# Altium PCB GATE_V3.PcbDoc
Units mm, origin at the board's own origin, x right, y up, seen from the top; angles counter-clockwise.
Board outline 71.37 x 50.42 mm, 2 copper layers (Top Layer, Bottom Layer); 47 components, 44 nets, 244 pads, 54 vias.
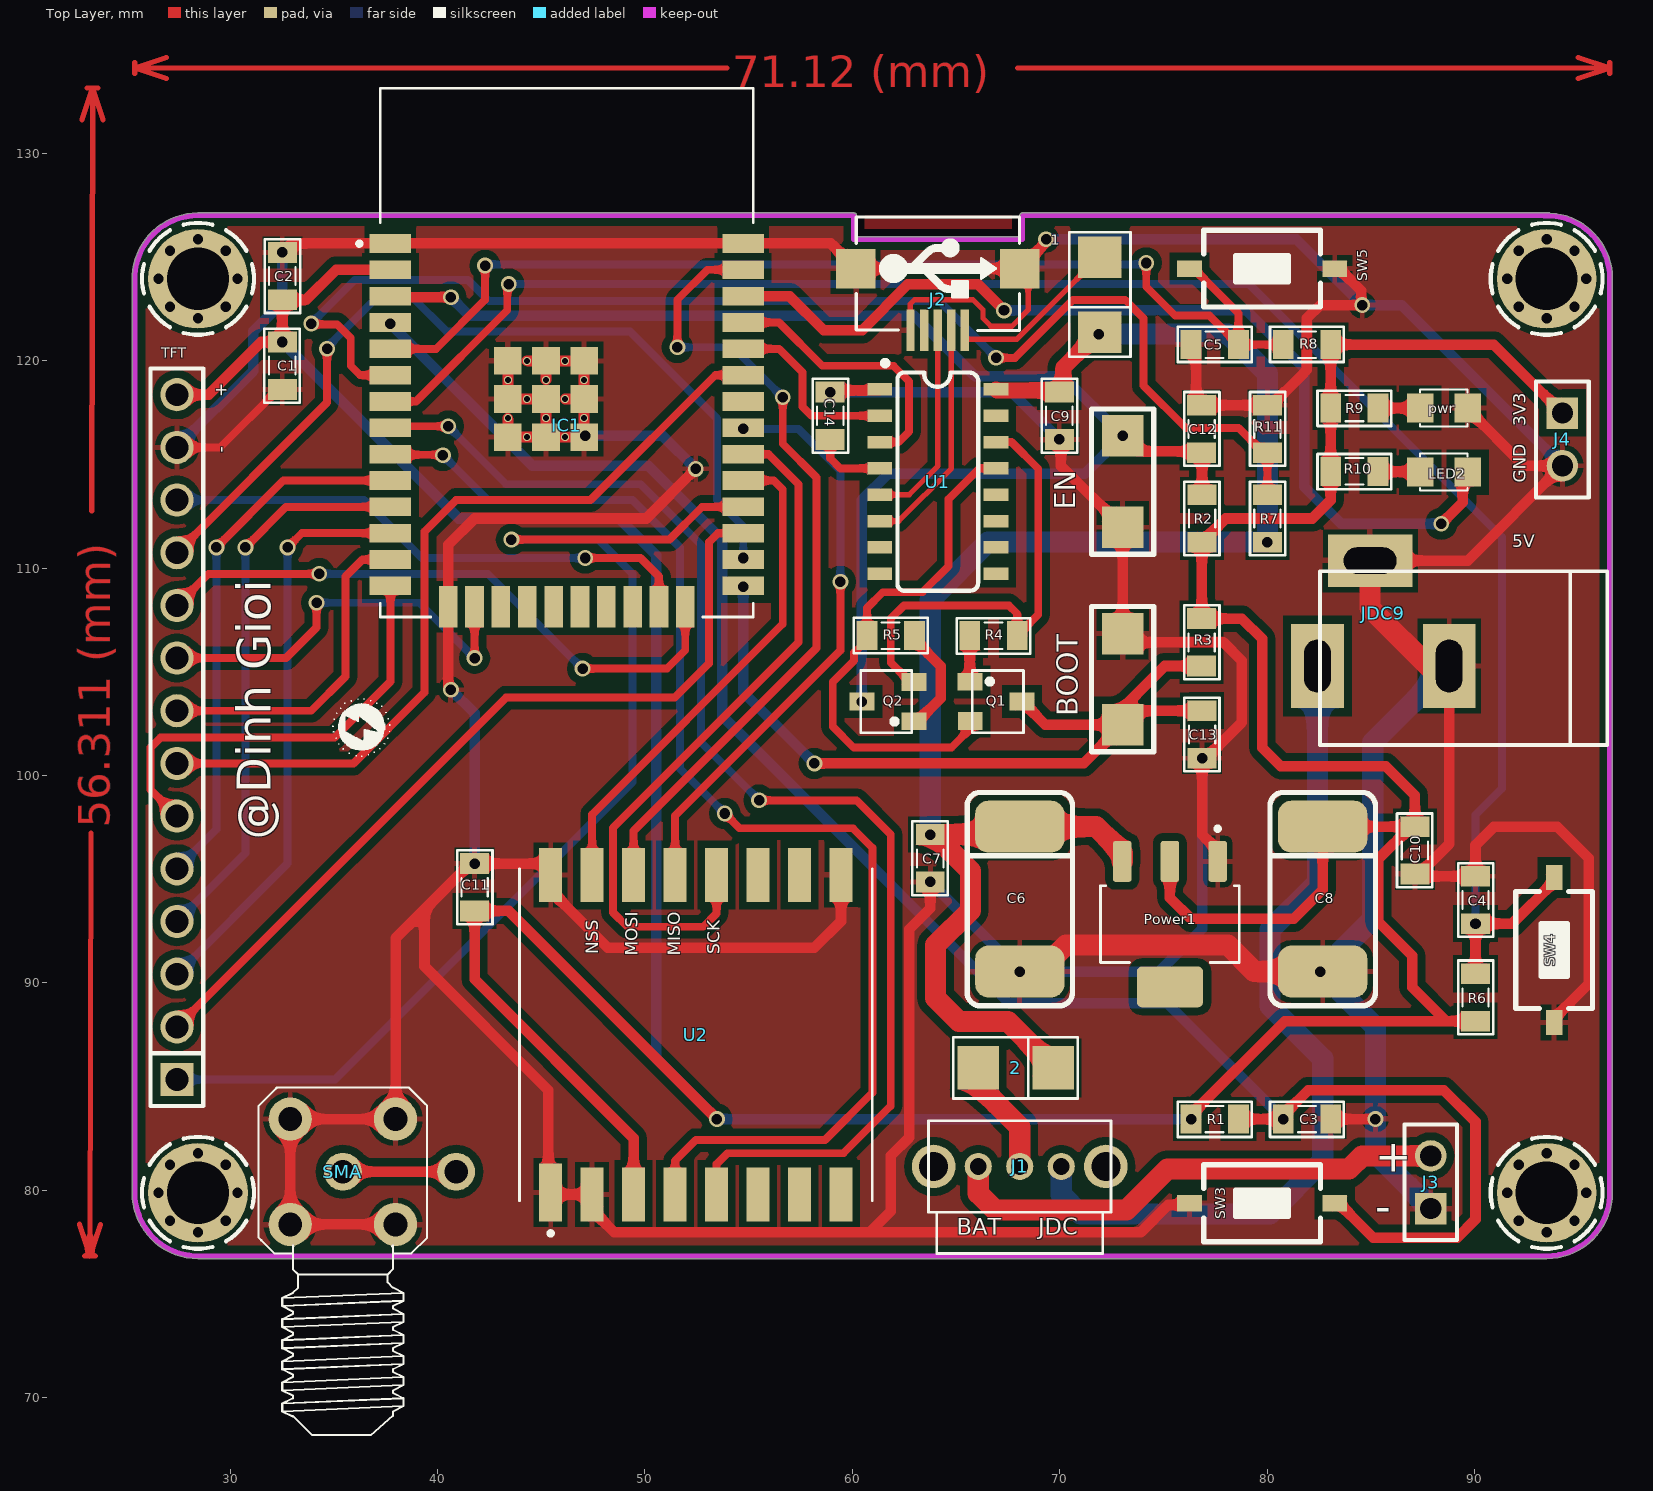
[diagram p0: Top Layer view]
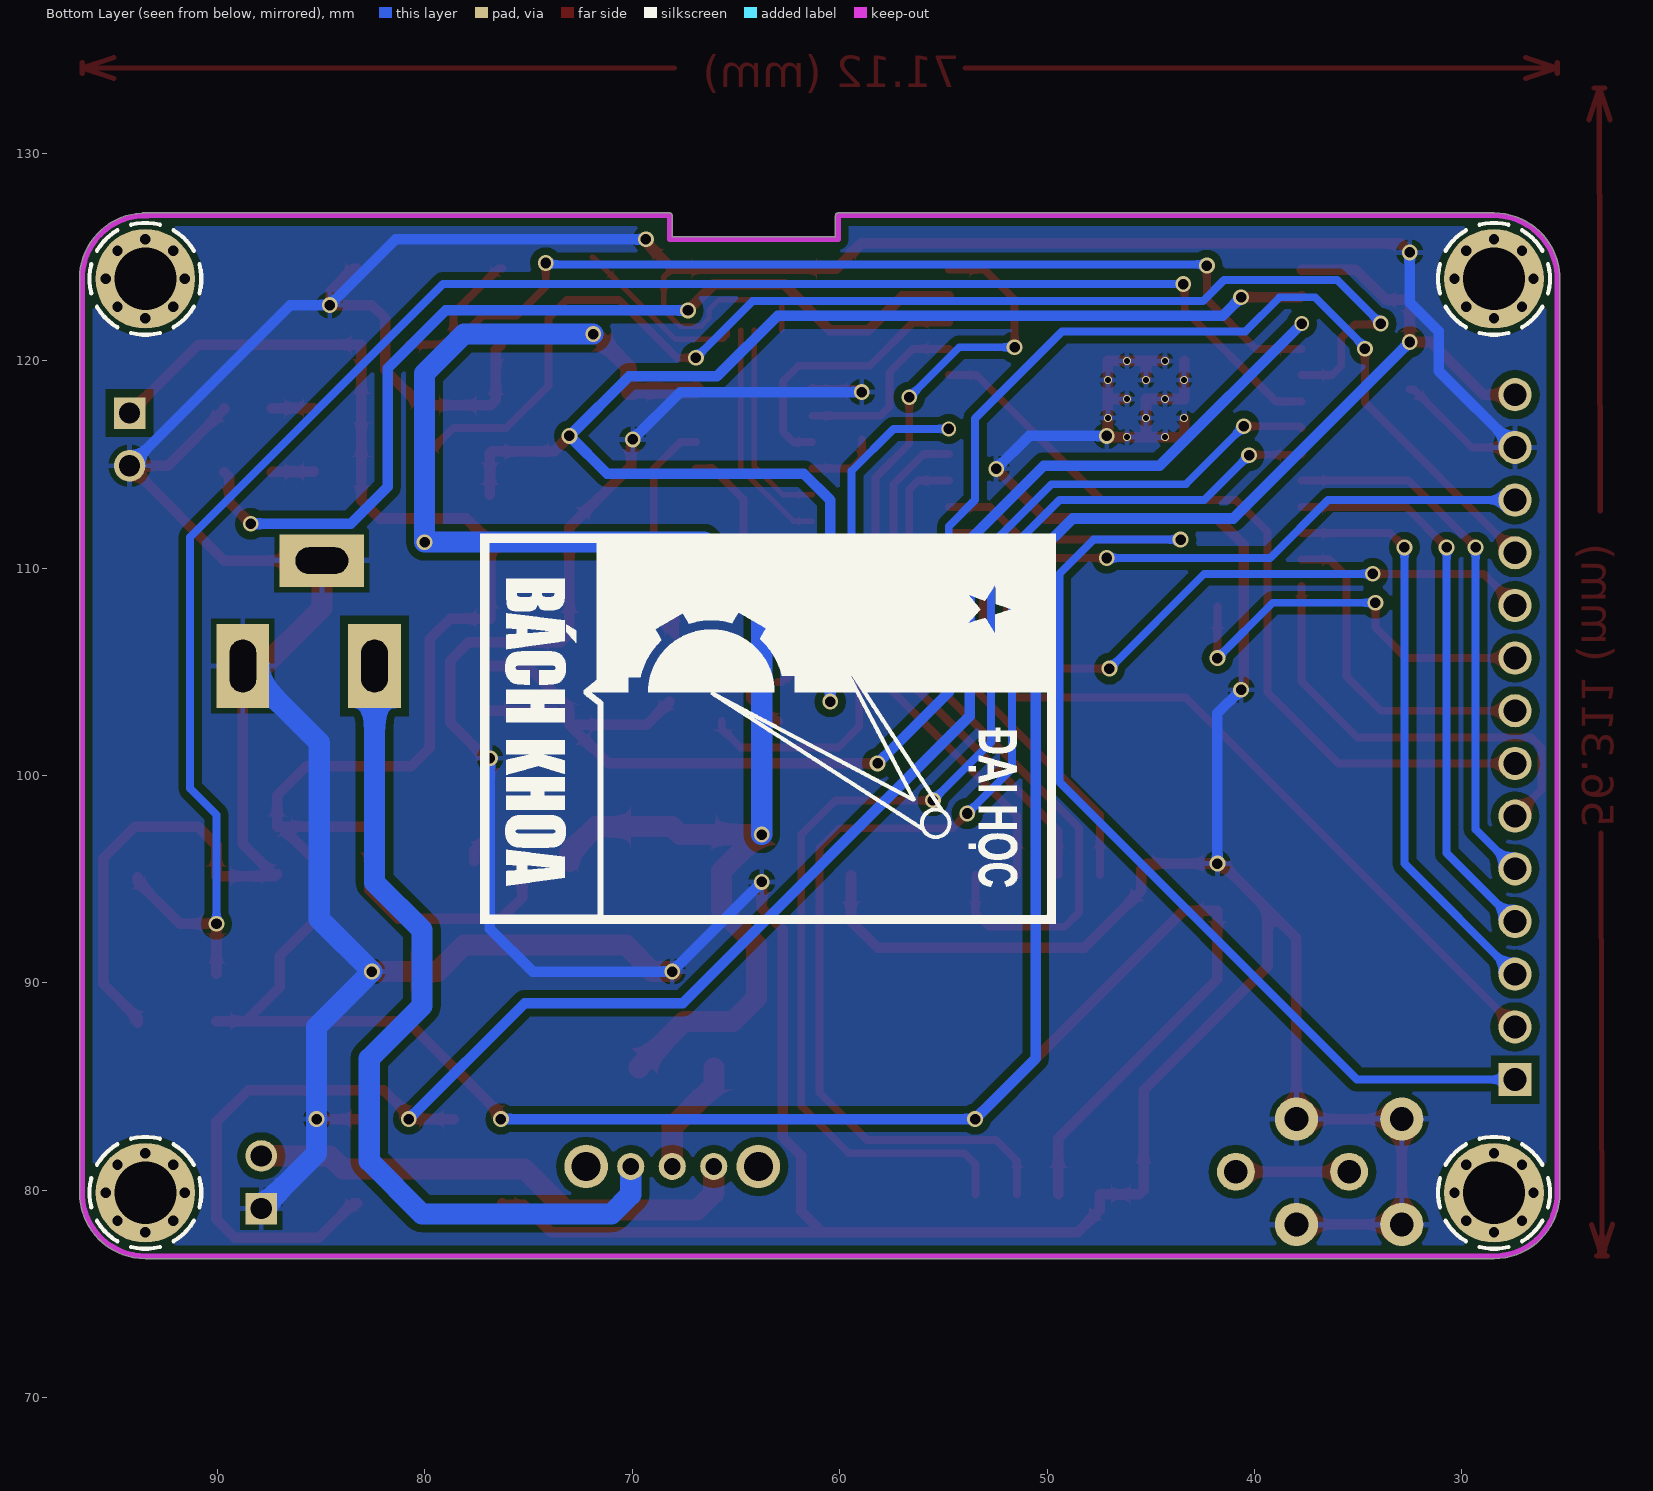
[diagram p1: Bottom Layer view, seen from below]

## Layer stack, top to bottom
Top Solder: solder mask 0.0102, Solder Resist, Dk 3.5
Top Layer: signal copper 0.0356
Dielectric 1: dielectric 0.32, FR-4, Dk 4.8
Bottom Layer: signal copper 0.0356
Bottom Solder: solder mask 0.0102, Solder Resist, Dk 3.5

## Board outline
28.447,76.708 cw(c28.448,79.883) 25.273,79.883 25.273,123.825 cw(c25.4,123.825) 25.274,123.846 cw(c28.448,123.952) 28.448,127.127 cw(c28.448,127) 28.449,127.127 60.071,127.127 cw(c60.071,127) 60.198,127 60.198,125.984 68.072,125.984 68.072,127 cw(c68.199,127) 68.199,127.127 93.599,127.127 cw(c93.599,127) 93.631,127.123 cw(c93.472,123.952) 96.647,123.952 cw(c96.52,123.952) 96.647,123.951 96.647,80.01 cw(c96.52,80.01) 96.646,79.989 cw(c93.472,79.883) 96.647,79.883 cw(c93.472,79.883) 93.472,76.708 28.448,76.708 cw(c28.448,76.835)

## Design rules (kind name [scope] priority, off if disabled: settings)
Clearance [All] p1: gap=0.254 ignorepadtopadclearanceinfootprint=TRUE except(0.381: Arc-Fill Arc-Poly Arc-Region Track-Fill Track-Poly Track-Region SMDPad-Fill SMDPad-Poly SMDPad-Region THPad-Fill THPad-Poly THPad-Region Via-Fill Via-Poly Via-Region Fill-Fill Fill-Poly Fill-Region Poly-Poly Poly-Region Region-Region)
PolygonConnect [All] p1: connectstyle=Relief reliefconductorwidth=0.254 reliefentries=4 polygonreliefangle="90 Angle" airgapwidth=0.254
RoutingVias [All] p1: holewidth=0.508 width=0.762 viastyle="Through Hole" minholewidth=0.508 minwidth=0.762 maxholewidth=0.711 maxwidth=1.27
SolderMaskExpansion [All] p1: expansion=0.102
Width [All] p1: maxlimit=1.016 minlimit=0.254 preferedwidth=0.508
30 further rules are at their usual default settings.

## Components (designator, comment, footprint, x,y, rotation, side; value= is the part's Value field where it differs from the comment)
1 "S4" DIO-214AC(SMA) 71.882,123.116 r90 top
2 "S4" DIO-214AC(SMA) 67.945,85.852 r180 top
BOOT "SW" "SW 3x2x4" 73.025,104.648 r90 top value="SW chip 2 pin" (schematic designator SW2)
C1 "10uF" CAP_0805 32.512,119.761 r270 top value=33p
C2 "100nF" CAP_0805 32.512,124.079 r90 top value=33p
C3 "100nF" CAP_0805 81.915,83.439 r0 top value=33p
C4 "100nF" CAP_0805 90.043,94.001 r90 top value=33p
C5 "100nF" CAP_0805 77.47,120.777 r180 top value=33p
C6 "22uF/10V" CAP_7343 68.072,94.107 r270 top
C7 "100nF" CAP_0805 63.754,96.012 r270 top value=33p
C8 "22uF/10V" CAP_7343 82.677,94.107 r270 top
C9 "10uF" CAP_0805 69.977,117.348 r90 top value=33p
C10 "100nF" CAP_0805 87.122,96.393 r270 top value=33p
C11 "10uF" CAP_0805 41.783,94.615 r90 top value=33p
C12 "100nF" CAP_0805 76.835,116.713 r90 top value=33p
C13 "100nF" CAP_0805 76.86,101.981 r270 top value=33p
C14 "100nF" CAP_0805 58.928,117.348 r90 top value=33p
EN "SW" "SW 3x2x4" 73.025,114.173 r270 top value="SW chip 2 pin" (schematic designator SW1)
IC1 "ESP32-WROOM-32" MODULE_ESP32-WROOM-32 46.228,120.396 r0 top
J1 "SK12D07VG4" SK12D07VG4 68.07,81.153 r0 top
J2 "USB-5" USB-M1 64.12,121.476 r0 top
J3 "JP2" JP2-C1T 87.884,79.121 r90 top
J4 "JP2" JP2-C1T 94.234,117.475 r270 top
JDC9 "Jac DC" DC-IN 85.598,107.823 r180 top
LED2 "LED" LED-0805-Blue 87.376,114.631 r0 top value="LED 3 ly Single Colour"
Power1 "AMS1117-3V3" SOT230P700X180-4N 75.311,92.837 r270 top
pwr "LED" LED-0805-Blue 87.376,117.717 r0 top value="LED 3 ly Single Colour" (schematic designator LED1)
Q1 "2SC1815" SOT23D 66.929,103.569 r270 top value=C1815
Q2 "2SC1815" SOT23D 61.722,103.569 r90 top value=C1815
R1 "10k" RES_SMD_0805 77.47,83.439 r0 top
R2 "10k" RES-SMD-0805 76.86,112.395 r270 top
R3 "10k" RES-SMD-0805 76.835,106.426 r90 top
R4 "10k" RES-SMD-0805 66.802,106.744 r0 top
R5 "10k" RES-SMD-0805 61.849,106.744 r180 top
R6 "10k" RES_SMD_0805 90.043,89.302 r90 top
R7 "31k" RES-SMD-0805 80.01,112.395 r90 top
R8 "10k" RES_SMD_0805 81.915,120.777 r180 top
R9 "1k" RES-SMD-0805 84.201,117.717 r0 top
R10 "1k" RES-SMD-0805 84.201,114.669 r0 top
R11 "11k" RES-SMD-0805 80.01,116.713 r90 top
SMA "210111003" SMA-RA 35.433,80.899 r0 top
SW3 "SW" SW-SMD 79.756,79.375 r0 top value="SW chip 2 pin"
SW4 "SW" SW-SMD 93.832,91.588 r90 top value="SW chip 2 pin"
SW5 "SW" SW-SMD 79.756,124.444 r180 top value="SW chip 2 pin"
TFT "JP14" JP14-D1T 27.432,85.344 r90 top
U1 "CH340C" SOP-16 64.12,114.173 r270 top
U2 "Ra-02 LoRa" Ra-02 52.451,87.503 r90 top

## Footprints (in the part's own frame and the unit in brackets; to place one, negate y for a bottom-side part, rotate by r counter-clockwise, add the part's x,y. Pads: shape width x height; smd on the part's side, far side on the other; paste and mask are expansions set on the pad)
CAP_0805 [mil]
  rect 39.37x55 smd: 1(-45,0) 2(45,0)
  silkscreen extent -70,-34 70,33, body extent -40,-25 40,25, height 24
CAP_7343 [mm] "Capacitor Tantalum 7343"
  rrect50% 2.5x4.3 smd: 1(-3.429,0) 2(3.556,0)
  silkscreen extent -5.08,-2.54 5.21,2.54, body extent -3.75,-2.14 3.75,2.16, height 2.8
DC-IN [mil] "Jac DC input"
  rect 100x160 hole 50 slot 100 at 90 deg: 1(125,100) 2(-125,100)
  rect 160x100 hole 50 slot 100 at 0 deg: 3(25,-100)
  silkscreen extent -425,-80 120,250, body extent -410,-105 134,269, height 434
DIO-214AC(SMA) [mm] "DO-214AC Diode Smallest Size"
  rect 2x2.1 smd: 1(1.88,-0.051) 2(-1.732,-0.051)
  silkscreen extent -2.92,-1.52 3.07,1.42, body extent -2.5,-1.35 2.7,1.25, height 2.4
JP2-C1T [mm] "2 row, straight, gold plating"
  rect 1.52x1.52 hole 1.02: 1(0,0)
  round 1.52 hole 1.02: 2(2.54,0)
  silkscreen extent -1.52,-1.27 4.06,1.27, body extent -1.52,-1.25 4.06,1.25, height 8.51
JP14-D1T [mm] "14 pins, 1 row, straight, gold plating"
  rect 1.6x1.6 hole 1.1: 1(0,0)
  round 1.6 hole 1.1: 2(2.54,0) 3(5.08,0) 4(7.62,0) 5(10.16,0) 6(12.7,0) 7(15.24,0) 8(17.78,0) 9(20.32,0) 10(22.86,0) 11(25.4,0) 12(27.94,0) 13(30.48,0) 14(33.02,0)
  silkscreen extent -1.27,-1.27 34.29,1.27, body extent -1.27,-1.27 34.29,1.27, height 8.54
LED-0805-Blue [mil]
  rect 50x55 smd: 1(0,0) 2(90,0)
  silkscreen extent 0,-35 90,35, body extent 5,-25 85,25, height 43
MODULE_ESP32-WROOM-32 [mm]
  rect 2x0.9 smd: 1(-8.5,5.26) 2(-8.5,3.99) 3(-8.5,2.72) 4(-8.5,1.45) 5(-8.5,0.18) 6(-8.5,-1.09) 7(-8.5,-2.36) 8(-8.5,-3.63) 9(-8.5,-4.9) 10(-8.5,-6.17) 11(-8.5,-7.44) 12(-8.5,-8.71) 13(-8.5,-9.98) 14(-8.5,-11.25) 25(8.5,-11.25) 26(8.5,-9.98) 27(8.5,-8.71) 28(8.5,-7.44) 29(8.5,-6.17) 30(8.5,-4.9) 31(8.5,-3.63) 32(8.5,-2.36) 33(8.5,-1.09) 34(8.5,0.18) 35(8.5,1.45) 36(8.5,2.72) 37(8.5,3.99) 38(8.5,5.26)
  rect 0.9x2 smd: 15(-5.715,-12.25) 16(-4.445,-12.25) 17(-3.175,-12.25) 18(-1.905,-12.25) 19(-0.635,-12.25) 20(0.635,-12.25) 21(1.905,-12.25) 22(3.175,-12.25) 23(4.445,-12.25) 24(5.715,-12.25)
  rect 1.33x1.33 smd: 39_1(-2.835,-0.405) 39_2(-1,-0.405) 39_3(0.835,-0.405) 39_4(-2.835,-2.24) 39_5(-1,-2.24) 39_6(0.835,-2.24) 39_7(-2.835,-4.075) 39_8(-1,-4.075) 39_9(0.835,-4.075)
  round 0.4 hole 0.3: 39_10(-1.917,-0.405) 39_11(-0.082,-0.405) 39_12(-2.835,-1.322) 39_13(-1,-1.322) 39_14(0.835,-1.322) 39_15(-1.917,-2.24) 39_16(-0.082,-2.24) 39_17(-2.835,-3.157) 39_18(-1,-3.157) 39_19(0.835,-3.157) 39_20(-1.917,-4.075) 39_21(-0.082,-4.075)
  silkscreen extent -10.1,-12.75 9,12.75, body extent -10.54,-12.75 8.98,12.75, height 3.2
Ra-02 [mm]
  rect 2.8x1.1 smd: 1(-7.6,7)
  rect 2.6x1.1 smd: 2(-7.7,5) 3(-7.7,3) 4(-7.7,1) 5(-7.7,-1) 6(-7.7,-3) 7(-7.7,-5) 8(-7.7,-7) 9(7.7,-7) 10(7.7,-5) 11(7.7,-3) 12(7.7,-1) 13(7.7,1) 14(7.7,3) 15(7.7,5) 16(7.7,7)
  silkscreen extent -9.68,-8.5 8,8.5, body extent -8,-8.49 8,8.51, height 3.03
RES-SMD-0805 [mil]
  rect 39.37x55 smd: 1(-45,0) 2(45,0)
  silkscreen extent -70,-34 70,33, body extent -39,-25 39,25, height 31
RES_SMD_0805 [mil]
  rect 39.37x55 smd: 1(-45,0) 2(45,0)
  silkscreen extent -70,-34 70,33, body extent -39,-25 39,25, height 31
SK12D07VG4 [mm]
  round 1.308 hole 0.8: 1(-2,0) 2(2,0) COM(0,0)
  round 2.1 hole 1.4: M1(-4.15,0) M2(4.15,0)
  silkscreen extent -4.4,-4.2 4.4,2.2
SMA-RA [mil]
  round 72 hole 45: 1(0,0)
  round 82 hole 45: 2(-100,-100) 3(100,-100) 4(100,100) 5(-100,100)
  silkscreen extent -160,-500 160,160, body extent -136,-457 139,137, height 394
SOP-16 [mm]
  rect 0.6x1.2 smd: 1(-4.445,-2.8) 2(-3.175,-2.8) 3(-1.905,-2.8) 4(-0.635,-2.8) 5(0.635,-2.8) 6(1.905,-2.8) 7(3.175,-2.8) 8(4.445,-2.8) 9(4.445,2.8) 10(3.175,2.8) 11(1.905,2.8) 12(0.635,2.8) 13(-0.635,2.8) 14(-1.905,2.8) 15(-3.175,2.8) 16(-4.445,2.8)
  silkscreen extent -5.84,-2.67 5.26,1.95, body extent -4.95,-3.47 4.95,3.47, height 1.75
SOT23D [mm] "SOT 23C - 1-3-2 - BCE"
  rect 0.85x1.2 smd: 1(-0.95,-1.25) 2(0.94,-1.245) 3(0,1.25)
  silkscreen extent -1.5,-1.14 1.5,1.32, body extent -1.5,-1.17 1.5,1.33, height 1.06
SOT230P700X180-4N [mm]
  rrect25% 1.97x0.89 smd: 1(-3.025,2.3) 2(-3.025,0) 3(-3.025,-2.3)
  rrect25% 1.97x3.19 smd: 4(3.025,0)
  silkscreen extent -4.7,-3.35 1.85,3.35
"SW 3x2x4" [mm]
  rect 2x2 smd: 1(-2.2,0) 2(2.2,0)
  silkscreen extent -3.5,-1.5 3.5,1.5, body extent -2.45,-1.45 2.45,1.45, height 2
SW-SMD [mm] "Switch SMD type"
  rect 1.2x0.8 smd: 1(-3.5,0) 2(3.5,0)
  silkscreen extent -2.82,-1.85 2.82,1.85, body extent -3.05,-1.85 3.05,1.85, height 2.5
USB-M1 [mm]
  rect 0.4x2 smd: 1(1.3,0) 2(0.65,0) 3(0,0) 4(-0.65,0) 5(-1.321,0)
  rect 1.9x1.9 smd: 5(-3.95,2.968) 5(3.95,2.968)
  silkscreen extent -3.94,-0.03 3.94,5.46, body extent -3.98,0.11 4,5.54, height 2.71

## Part data
1 2: library part "Diode S4", "D醤", Chung_Loai=D醤, Don_Vi=Con, Ma_Hang=MH005519, Ten_Linh_Kien="Diode S4 SOD123 ( 1N5819 SOD123)"
BOOT EN SW3 SW4 SW5: library part SW2, "Switch button 2 pin"
C1 C2 C3 C4 C5 C7 C9 C10 C11 C12 C13 C14: library part CapSMD, "Capacitor", LatestRevisionDate=17-Jul-2002, LatestRevisionNote="Re-released for DXP Platform.", PackageReference=RAD-0.3, Published=8-Jun-2000, Publisher="Altium Limited"
C6 C8: library part CAP_TAN_SMD, "Polazied Tantalum Capacitor"
IC1: "Bluetooth, WiFi Transceiver Module 2.4GHz ~ 2.5GHz Surface Mount", Package="Module Espressif Systems", Digi-Key_Part_Number=1904-1010-1-ND, Digi-Key_Purchase_URL=https://www.digikey.com/product-detail/en/espressif-systems/ESP32-WROOM-32/1904-1010-1-ND/8544305?utm_source=snapeda&utm_medium=aggregator&utm_campaign=symbol, MF="Espressif Systems", MP=ESP32-WROOM-32, SnapEDA_Link=https://www.snapeda.com/parts/ESP32-WROOM-32/Espressif%20Systems/view-part/2753322/?ref=snap
J1: "Switch Slide ON ON SPDT Side Slide 0.3A 30VDC PC Pins Bracket Mount/Through Hole Bulk", Package=None, Availability="Not in stock", Check_prices=https://www.snapeda.com/parts/SK12D07VG4/C&K/view-part/6618061/?ref=eda, MF=C&K, MP=SK12D07VG4, Price=None, SnapEDA_Link=https://www.snapeda.com/parts/SK12D07VG4/C&K/view-part/6618061/?ref=snap
J2: Manufacturer=FCI, Manufacturer Part Number=10118193-0001LF, Supplier Part Number 1=609-4616-1-ND, .Checked PCB=RF, .Checked SCH=MM, .Creator=MM, Category="Connectors, Interconnects", ComponentLink1Description=http://portal.fciconnect.com/Comergent//fci/drawing/10118193.pdf, ComponentLink1URL=http://portal.fciconnect.com/Comergent//fci/drawing/10118193.pdf, Connector Type="USB - micro B", Features="Shielded, Solder Retention", Gender=Receptacle, Ingress Protection=-, Mounting Type="Surface Mount, Right Angle, Horizontal", Number of Contacts=5, Packaging="Cut Tape (CT)", Pricing 1="1=0.46, 10=0.433, 25=0.3712, 50=0.3156, 100=0.3032, 250=0.27224, 500=0.25988 (USD)", RoHS="RoHS Compliant", Specifications="USB 2.0", Stock 1=28642, Supplier 1=Digi-Key
J3 J4: "WR-PHD 2.54 mm Angled Socket Header", Manufacturer="Würth Elektronik eiSos GmbH", partNo=613002143121, ComponentLink1 Description=Manufacturer, ComponentLink1URL=http://www.we-online.com, ComponentLink2 Description=Datasheet, ComponentLink2URL=http://katalog.we-online.de/em/datasheet/6130xx143121.pdf, Created by="Karrer Zheng", Created Date="29 March 2013", NoPins=02
JDC9: library part DCIN, "Jac DC input"
LED2 pwr: "LED Single colour Green and Red"
Power1: library part LM1117, "800mA Low-Dropout Linear Regulator", Creator="Nguyen Ba Bien", Website=http://group3i.net
Q1 Q2: library part C1815, "NPN 600mW, ECB", =C2383
R1 R4 R5 R6 R8: library part "Resistor - SMD", "Resistor SMD", Manufacturer="Generic Components", Class=Passive, Published=08/06/2000, Publisher="Altium Hobart Technology Centre"
R2 R3 R7 R9 R10 R11: library part "Resistor - SMD", "Resistor", Manufacturer="Generic Components", Class=Passive, Published=08/06/2000, Publisher="Altium Hobart Technology Centre"
SMA: library part "CON Ant", "CONNECTOR ANTEN", Manufacturer="Würth Elektronik eiSos GmbH", ComponentLink1Description=Manufacturer, ComponentLink1URL=http://www.we-online.de, ComponentLink2Description=Datasheet, ComponentLink2URL=http://katalog.we-online.de/kataloge/eisos/index.php?language=en&pf=Filter_gerade, Created by="Christin Zierenner", Created Date="May 2012", partNo=210111003
TFT: "WR-PHD 2.54 mm Angled Socket Header", Manufacturer="Würth Elektronik eiSos GmbH", partNo=613014143121, ComponentLink1 Description=Manufacturer, ComponentLink1URL=http://www.we-online.com, ComponentLink2 Description=Datasheet, ComponentLink2URL=http://katalog.we-online.de/em/datasheet/6130xx143121.pdf, Created by="Karrer Zheng", Created Date="29 March 2013", NoPins=14
U1: "USB to serial chip CH340", Package=Package, Availability=Unavailable, Check_prices=https://www.snapeda.com/parts/CH340C/WCH/view-part/5428851/?ref=eda, MF=WCH, MP=CH340C, Price=None, SnapEDA_Link=https://www.snapeda.com/parts/CH340C/WCH/view-part/5428851/?ref=snap
U2: "LoRa Module Ra-02"

## Free pads (board coordinates)
  round 4.8 hole 3: 16(28.448,79.883) 16(28.448,123.952) 16(93.472,79.883) 16(93.472,123.952)
  round 0.5 hole 0.5: 17(30.353,79.883) 17(30.353,123.952) 17(95.377,79.883) 17(95.377,123.952) 18(29.795,81.23) 18(29.795,125.299) 18(94.819,81.23) 18(94.819,125.299) 19(28.448,81.788) 19(28.448,125.857) 19(93.472,81.788) 19(93.472,125.857) 20(27.101,81.23) 20(27.101,125.299) 20(92.125,81.23) 20(92.125,125.299) 21(26.543,79.883) 21(26.543,123.952) 21(91.567,79.883) 21(91.567,123.952) 22(27.101,78.536) 22(27.101,122.605) 22(92.125,78.536) 22(92.125,122.605) 23(28.448,77.978) 23(28.448,122.047) 23(93.472,77.978) 23(93.472,122.047) 24(29.795,78.536) 24(29.795,122.605) 24(94.819,78.536) 24(94.819,122.605)
  round 1.829 hole 1.143: 25(40.894,80.899)

## Via types
v1: diameter 0.762, hole 0.508, Top Layer to Bottom Layer, 51 vias
v2: diameter 0.711, hole 0.508, Top Layer to Bottom Layer, 3 vias

## Nets (pads, with @x,y where several pads share a name; then routed paths per layer and width w, separated by ;. In a path a pad name is that pad's centre, name@x,y a point inside that pad or via, vN(x,y) a via of type N, cw(c..) or ccw(c..) an arc to the next point about the centre after c; other vN are vias at no path point)
3V3: C1.1 C2.1 C8.1 C10.1 C11.1 IC1.2 J4.1 Power1.2 R1.1 R2.2 R3.2 R6.1 R8.1 R9.1 R10.1 TFT.14 U2.3 | length 214.1
  Top Layer w0.508: TFT.14 28.956,118.364 31.496,120.904 v1(32.512,120.904) C2.1 33.655,122.936 35.105,124.386 IC1.2 ; U2.3 49.451,82.502 41.783,90.17 C11.1 43.434,93.472 v1(53.467,83.439) ; Power1.2 75.311,94.107 76.327,93.091 81.28,93.091 82.677,94.488 C8.1 C10.1@86.923,97.536 ; v1(76.327,83.439) 76.327,83.637 80.849,88.159 R6.1 ; 88.582,88.201 86.995,89.789 86.995,91.313 85.363,92.945 85.363,95.976 C10.1@86.923,97.536 ; J4.1 90.932,120.777 R8.1 R9.1 R10.1 83.058,113.284 82.169,112.395 78.003,112.395 R2.2 76.848,111.239 76.848,107.582 R3.2 78.781,107.569 79.756,106.594 79.756,101.346 80.645,100.457 85.725,100.457 87.122,99.06 C10.1 C10.1@86.924,97.536
  Bottom Layer w0.508: v1(32.512,120.904) 41.021,112.395 48.768,112.395 50.546,110.617 50.546,86.36 v1(53.467,83.439) v1(76.327,83.439)
5V: 1.2 2.2 C6.1 C7.1 C9.2 Power1.3 R7.1 U1.16 | length 79.6
  Top Layer w0.762: U1.16 66.966,118.572 69.896,118.572 C9.2 70.16,118.491 70.168,118.499 70.168,119.668 71.883,121.384 1.2
  Top Layer w1.016: v1(63.754,97.155) 63.937,97.155 65.684,95.407 65.684,93.497 64.008,91.821 64.008,89.266 65.136,88.138 67.492,88.138 69.677,85.953 2.2 ; C7.1@63.762,97.163 67.699,97.163 C6.1 71.751,97.536 73.011,96.276 Power1.3
  Bottom Layer w1.016: v1(63.754,97.155) 63.754,108.458 66.548,111.252 v1(80.01,111.252) 80.01,119.38 78.105,121.285 v1(71.882,121.285)
Adapter: J1.2 JDC9.1 | length 41.3
  Bottom Layer w1.016: J1.2 70.07,79.79 70.993,78.867 80.137,78.867 82.677,81.407 82.677,86.351 80.137,88.891 80.137,92.566 82.423,94.852 JDC9.1
ANTTEN: pad.25 SMA.1 | length 5.5
  Top Layer w0.508: SMA.1 pad.25
CH340_RX: IC1.35 U1.3 | length 13.2
  Top Layer w0.381: IC1.35 56.462,121.846 58.547,119.761 61.976,119.761 62.738,118.999 62.738,116.586 62.23,116.078 U1.3
CH340_TX: IC1.34 U1.2 | length 8.9
  Top Layer w0.381: IC1.34 56.462,120.576 57.594,119.444 57.594,117.78 58.027,117.348 U1.2
CS: IC1.23 TFT.12 | length 26.2
  Top Layer w0.381: v1(47.117,110.49) 49.784,110.49 50.673,109.601 IC1.23
  Bottom Layer w0.381: TFT.12 36.449,113.284 39.243,110.49 v1(47.117,110.49)
D+: J2.3 U1.5 | length 9.9
  Top Layer w0.254: U1.5 62.738,113.538 64.12,114.92 J2.3
D-: J2.2 U1.6 | length 11.2
  Top Layer w0.254: U1.6 62.23,112.268 64.77,114.808 J2.2
D/C: IC1.24 TFT.10 | length 29.5
  Top Layer w0.381: TFT.10 28.956,109.728 v1(34.29,109.728) ; v1(46.99,105.156) 51.054,105.156 51.943,106.045 IC1.24
  Bottom Layer w0.381: v1(34.29,109.728) 42.418,109.728 v1(46.99,105.156)
EN: C12.1 EN.1 IC1.3 Q2.3 R2.1 | length 67.9
  Top Layer w0.508: IC1.3 37.781,123.063 v1(40.64,123.063) ; v1(60.452,103.569) Q2.3 ; v1(73.025,116.373) 73.771,115.627 76.778,115.627 C12.1 76.86,115.545 R2.1
  Bottom Layer w0.508: v1(40.64,123.063) 41.529,122.174 62.992,122.174 65.913,119.253 70.145,119.253 v1(73.025,116.373) 71.206,114.554 61.722,114.554 60.452,113.284 v1(60.452,103.569)
feedback: IC1.6 R7.2 R11.1 | length 62.3
  Top Layer w0.381: v1(33.909,121.793) 33.948,121.754 35.155,121.754 35.814,121.095 35.814,119.761 36.269,119.306 IC1.6 ; v1(66.929,120.142) 67.837,120.142 70.631,122.936 73.152,122.936 74.041,122.047 74.041,118.798 76.073,116.766 78.615,116.766 79.812,115.57 R11.1 R7.2
  Bottom Layer w0.381: v1(33.909,121.793) 36.005,123.888 41.465,123.888 42.481,122.872 64.198,122.872 v1(66.929,120.142)
GND: BOOT.2 C1.2 C2.2 C3.2 C4.2 C5.2 C6.2 C7.2 C8.2 C9.1 C10.2 C11.2 C12.2 C13.2 C14.2 EN.2 IC1.1 IC1.15 IC1.38 IC1.39_1 IC1.39_2 IC1.39_3 IC1.39_4 IC1.39_5 IC1.39_6 IC1.39_7 IC1.39_8 IC1.39_9 IC1.39_10 IC1.39_11 IC1.39_12 IC1.39_13 IC1.39_14 IC1.39_15 IC1.39_16 IC1.39_17 IC1.39_18 IC1.39_19 IC1.39_20 IC1.39_21 J2.5 J3.1 J4.2 JDC9.2 JDC9.3 Power1.1 pwr.2 R11.2 SMA.2 SMA.3 SMA.4 SMA.5 SW3.1 SW4.1 SW5.1 TFT.13 U1.1 U2.1 U2.2 U2.9 U2.16 | length 454.9
  Top Layer w0.254: J2.5@62.799,121.476 62.792,121.484 62.792,122.731 63,122.939 65.813,122.939 66.294,122.458 66.294,122.047 66.675,121.666 67.691,121.666 68.475,122.45 68.475,124.039 J2.5@68.07,124.444
  Top Layer w0.381: TFT.13 29.519,115.824 32.314,118.618 C1.2
  Top Layer w0.508: v1(32.512,125.222) 32.946,125.656 IC1.1 IC1.38 58.958,125.656 60.17,124.444 68.07,124.444 69.293,125.667 69.293,125.808 v1(69.342,125.857) ; SMA.3 SMA.2 SMA.5 SMA.4 37.973,92.146 39.37,93.543 ; v1(40.64,104.14) 40.513,104.267 IC1.15 40.513,111.125 41.783,112.395 50.058,112.395 v1(52.451,114.788) ; IC1.39_17 IC1.39_7 IC1.39_20 IC1.39_8 ; IC1.39_1 IC1.39_12 IC1.39_4 IC1.39_15 IC1.39_5 IC1.39_18 IC1.39_8 ; IC1.39_10 IC1.39_2 ; IC1.39_13 IC1.39_2 ; IC1.39_16 IC1.39_6 ; IC1.39_9 IC1.39_21 IC1.39_8 ; IC1.39_9@47.063,116.373 IC1.39_19 IC1.39_6 ; v1(58.928,118.491) 59.009,118.572 61.274,118.572 U1.1 ; U2.9 59.451,92.979 58.166,91.694 48.21,91.694 45.451,94.453 U2.16 45.451,95.462 45.155,95.758 v1(41.783,95.758) 41.585,95.758 39.37,93.543 ; v1(63.754,94.869) 63.754,93.599 62.738,92.583 62.738,82.55 61.849,81.661 61.849,78.994 60.833,77.978 ; v1(69.977,116.205) 70.055,116.127 70.055,114.943 EN.2 BOOT.2 73.447,106.426 77.892,106.426 78.781,105.537 78.781,102.56 77.059,100.838 v1(76.86,100.838) 76.86,97.153 77.611,96.402 Power1.1 ; SW3.1 76.18,79.299 75.235,79.299 73.914,77.978 60.833,77.978 ; C5.2 76.573,120.531 76.573,118.102 76.819,117.856 C12.2 R11.2 80.208,117.856 81.659,119.306 81.661,119.306 81.915,119.56 81.915,122.047 82.55,122.682 v1(84.582,122.682) 84.533,122.731 84.533,123.366 83.456,124.444 SW5.1 ; C3.2 v1(85.217,83.439) ; JDC9.3 85.725,110.363 89.662,110.363 J4.2 92.38,114.935 89.662,117.653 pwr.2 ; JDC9.2@88.519,105.029 JDC9.2 88.773,105.029 88.773,96.703 87.32,95.25 C10.2 87.228,95.144 C4.2 90.043,96.645 90.934,97.536 93.98,97.536 95.504,96.012 95.504,89.96 93.832,88.288 SW4.1 ; 39.37,93.543 39.37,90.805 45.339,84.836 45.339,80.015 U2.1 45.551,79.803 U2.2 47.451,79.053 48.526,77.978 60.833,77.978 ; IC1.39_2 IC1.39_11 IC1.39_3 IC1.39_14 IC1.39_6
  Top Layer w1.016: v1(68.072,90.551) 69.035,90.551 70.305,91.821 78.105,91.821 79.375,90.551 C8.2 ; JDC9.3@85.725,110.363 84.963,109.601 84.963,108.077 88.011,105.029 JDC9.2@88.519,105.029
  Bottom Layer w0.508: TFT.13 31.115,119.507 31.115,121.412 32.512,122.809 v1(32.512,125.222) ; v1(40.64,104.14) 41.783,102.997 v1(41.783,95.758) ; v1(47.117,116.373) 50.866,116.373 v1(52.451,114.788) ; v1(58.928,118.491) 67.691,118.491 v1(69.977,116.205) ; v1(63.754,94.869) v1(68.072,90.551) 74.803,90.551 76.86,92.608 v1(76.86,100.838) ; v1(69.342,125.857) 81.407,125.857 v1(84.582,122.682) 86.487,122.682 J4.2
  Bottom Layer w1.016: J3.1 85.218,81.787 v1(85.217,83.439) 85.218,87.883 v1(82.55,90.551) 85.09,93.091 85.09,101.6 JDC9.2
IO_0: BOOT.1 C13.1 IC1.25 Q1.3 R3.1 | length 39.5
  Top Layer w0.508: IC1.25 IC1.25@54.737,109.155 ; v1(58.166,100.584) 71.161,100.584 BOOT.1 ; Q1.3 69.3,102.448 BOOT.1 ; BOOT.1@73.701,103.124 C13.1 ; R3.1 75.057,105.283 73.025,103.251 BOOT.1
  Bottom Layer w0.508: v1(54.737,109.093) 54.737,104.013 v1(58.166,100.584)
IO_35: IC1.36 LED2.2 | length 46.4
  Top Layer w0.508: IC1.36 56.97,123.116 58.61,121.476 60.472,121.476 62.678,123.682 66.056,123.682 v1(67.31,122.428) ; v1(88.392,112.141) 89.421,113.17 89.421,114.39 LED2.2
  Bottom Layer w0.508: v1(67.31,122.428) 78.994,122.428 81.788,119.634 81.788,113.919 83.566,112.141 v1(88.392,112.141)
LED: IC1.33 TFT.7 | length 39.6
  Top Layer w0.381: TFT.7 35.941,100.584 39.37,104.013 39.37,111.76 40.894,113.284 47.371,113.284 53.393,119.306 IC1.33
Lora_DIO0: IC1.8 U2.5 | length 62
  Top Layer w0.381: IC1.8 37.802,116.84 v1(40.513,116.84) ; U2.5 53.451,81.264 53.975,81.788 59.563,81.788 61.849,84.074 61.849,97.155 60.198,98.806 v1(55.499,98.806)
  Bottom Layer w0.381: v1(40.513,116.84) 43.307,114.046 49.784,114.046 52.705,111.125 52.705,101.6 v1(55.499,98.806)
MISO: IC1.31 U2.13 | length 28.3
  Top Layer w0.381: U2.13 51.451,98.06 59.421,106.03 v1(59.421,109.347)
  Bottom Layer w0.381: v2(54.737,116.713) 57.404,116.713 59.421,114.696 v1(59.421,109.347)
MOSI: IC1.37 U2.14 | length 39.5
  Top Layer w0.381: U2.14 49.451,97.33 58.27,106.149 58.27,114.375 56.642,116.003 v1(56.642,118.237) ; v1(51.562,120.65) 51.562,122.939 53.009,124.386 IC1.37
  Bottom Layer w0.381: v1(51.562,120.65) 54.229,120.65 v1(56.642,118.237)
Net1_1: 1.1 J2.1 | length 8.5
  Top Layer w0.254: J2.1 65.42,121.231 65.62,121.031 67.918,121.031 71.883,124.996 1.1
Net2_1: 2.1 J1.COM | length 5.6
  Top Layer w1.016: 2.1 66.065,85.065 68.07,83.06 J1.COM
NetC14_1: C14.1 U1.4 | length 3.5
  Top Layer w0.381: C14.1 58.928,115.301 59.421,114.808 U1.4
NetJ1_1: J1.1 J3.2 | length 24.5
  Top Layer w1.016: J1.1 66.07,79.853 66.87,79.053 73.211,79.053 75.184,81.026 83.947,81.026 84.582,81.661 J3.2
NetLED1_1: pwr.1 R9.2 | length 2
  Top Layer w0.508: R9.2 pwr.1
NetLED2_1: LED2.1 R10.2 | length 2
  Top Layer w0.508: R10.2 85.363,114.65 87.357,114.65 LED2.1
NetQ1_1: Q1.1 R4.1 | length 2.2
  Top Layer w0.508: R4.1 65.659,104.539 Q1.1
NetQ1_2: Q1.2 R5.2 U1.13 | length 25.1
  Top Layer w0.381: Q1.2 65.684,102.26 64.77,101.346 60.071,101.346 59.055,102.362 59.055,104.512 60.086,105.543 60.086,105.925 60.706,106.546 R5.2 60.706,108.077 61.468,108.839 63.373,108.839 64.643,110.109 64.643,113.334 66.117,114.808 U1.13
NetQ2_1: Q2.1 R5.1 | length 5.3
  Top Layer w0.508: Q2.1 63.147,102.619 64.262,103.734 64.262,105.276 62.992,106.546 R5.1
NetQ2_2: Q2.2 R4.2 U1.14 | length 22.2
  Top Layer w0.381: Q2.2 62.792,104.509 61.849,105.451 61.849,107.569 62.484,108.204 67.544,108.204 67.945,107.803 R4.2 68.961,107.76 68.961,114.788 67.671,116.078 U1.14
NSS: IC1.29 U2.15 | length 24.5
  Top Layer w0.381: U2.15 47.451,98.124 56.642,107.315 56.642,113.792 56.208,114.226 IC1.29
Reset_TFT: IC1.26 TFT.11 | length 42.4
  Top Layer w0.381: TFT.11 34.671,117.983 v1(34.671,120.576)
  Bottom Layer w0.381: v1(34.671,120.576) 34.671,120.65 37.084,123.063 38.785,123.063 40.436,121.412 49.276,121.412 53.467,117.221 53.467,113.284 54.737,112.014 v2(54.737,110.49)
Rst_lora: IC1.9 U2.4 | length 61.6
  Top Layer w0.381: IC1.9 37.754,115.469 40.233,115.469 v1(40.259,115.443) ; U2.4 51.451,81.423 52.451,82.423 58.674,82.423 60.96,84.709 60.96,96.52 60.023,97.457 54.562,97.457 v1(53.848,98.171)
  Bottom Layer w0.381: v1(40.259,115.443) 42.418,113.284 49.403,113.284 51.689,110.998 51.689,100.33 v1(53.848,98.171)
SCK: IC1.30 U2.12 | length 35
  Top Layer w0.381: U2.12 53.451,93.35 52.811,92.71 49.149,92.71 48.456,93.403 48.456,97.478 57.404,106.426 57.404,114.046 55.954,115.496 IC1.30
SCK_TFT: IC1.13 TFT.8 | length 16.1
  Top Layer w0.381: TFT.8 33.909,103.124 35.56,104.775 35.56,109.601 36.375,110.416 IC1.13
SDI: IC1.16 TFT.9 | length 19.7
  Top Layer w0.381: TFT.9 32.692,105.664 34.163,107.135 v1(34.163,108.331) ; v1(41.783,105.664) IC1.16
  Bottom Layer w0.381: v1(34.163,108.331) 39.116,108.331 v1(41.783,105.664)
SDO: IC1.14 TFT.6 | length 21.3
  Top Layer w0.381: TFT.6 26.162,99.314 26.162,101.346 26.645,101.829 35.027,101.829 37.728,104.53 IC1.14
SW1: C3.1 IC1.4 R1.2 SW3.2 | length 89.2
  Top Layer w0.508: R1.2 v1(80.772,83.439) 80.772,83.637 81.97,84.836 88.519,84.836 90.043,83.312 90.043,78.613 89.154,77.724 85.107,77.724 83.456,79.375 SW3.2
  Bottom Layer w0.508: v2(37.719,121.793) 44.577,114.935 50.165,114.935 53.721,111.379 53.721,102.87 67.564,89.027 75.184,89.027 v1(80.772,83.439)
SW2: C4.1 IC1.7 R6.2 SW4.2 | length 88.1
  Top Layer w0.381: IC1.7 38.961,118.036 43.361,122.436 43.361,123.625 v1(43.434,123.698)
  Top Layer w0.508: R6.2 v1(90.043,92.858) 91.802,92.858 93.832,94.888 SW4.2
  Bottom Layer w0.381: v1(43.434,123.698) 79.121,123.698 91.313,111.506 91.313,99.376 90.043,98.106 v1(90.043,92.858)
SW3: C5.1 IC1.5 R8.2 SW5.2 | length 52.8
  Top Layer w0.381: IC1.5 39.931,120.576 42.291,122.936 v1(42.291,124.587) ; v1(74.168,124.714) 74.168,123.571 75.565,122.174 77.216,122.174 C5.1 ; SW5.2 76.456,124.444 78.613,122.287 C5.1 ; R8.2 C5.1
  Bottom Layer w0.381: v1(42.291,124.587) 42.355,124.65 74.105,124.65 v1(74.168,124.714)
T_CLK: IC1.10 TFT.5 | length 26
  Top Layer w0.381: v1(29.337,110.998) 32.565,114.226 IC1.10
  Bottom Layer w0.381: TFT.5 29.337,97.409 v1(29.337,110.998)
T_CS: IC1.11 TFT.4 | length 27.2
  Top Layer w0.381: v1(30.734,110.998) 32.692,112.956 IC1.11
  Bottom Layer w0.381: TFT.4 30.734,96.266 v1(30.734,110.998)
T_DIN: IC1.12 TFT.3 | length 28
  Top Layer w0.381: v1(32.766,110.998) 33.454,111.686 IC1.12
  Bottom Layer w0.381: TFT.3 32.766,95.758 v1(32.766,110.998)
T_IRQ: IC1.28 TFT.1 | length 56.3
  Top Layer w0.381: v1(43.561,111.379) 51.181,111.379 52.758,112.956 IC1.28
  Bottom Layer w0.381: TFT.1 35.052,85.344 49.403,99.695 49.403,109.728 47.752,111.379 v1(43.561,111.379)
T_OUT: IC1.27 TFT.2 | length 40.6
  Top Layer w0.381: TFT.2 43.307,103.759 51.435,103.759 53.086,105.41 53.086,111.252 53.52,111.686 IC1.27
pads on no net: IC1.17 IC1.18 IC1.19 IC1.20 IC1.21 IC1.22 IC1.32 J1.M1 J1.M2 J2.4 Power1.4 U1.7 U1.8 U1.9 U1.10 U1.11 U1.12 U1.15 U2.6 U2.7 U2.8 U2.10 U2.11
copper on no net: | length 112.8
  Top Layer w0.254: 22.736,78.36 23.241,76.835 ; 22.857,131.623 23.368,133.146 ; 22.987,76.836 23.495,76.834 ; 23.114,133.147 23.622,133.145 ; 23.287,97.221 23.241,76.835 ; 23.322,112.76 23.368,133.146 ; 23.752,78.358 23.241,76.835 ; 23.873,131.621 23.368,133.146 ; 25.4,133.858 25.4,134.366 ; 26.924,133.604 25.4,134.112 ; 26.924,134.62 25.4,134.112 ; 53.952,134.112 25.4,134.112 ; 67.968,134.112 96.52,134.112 ; 94.996,133.604 96.52,134.112 ; 94.996,134.62 96.52,134.112 ; 96.52,133.858 96.52,134.366

## Polygon pours and split planes (outlines as drawn)
GND on Bottom Layer "Bottom Layer-GND" (solid, pour order 2): 25.527,125.349 26.67,126.492 27.432,126.492 27.94,127 60.071,127 60.071,125.857 67.945,125.857 68.199,126.111 68.199,127 93.599,127 93.726,126.873 94.615,126.873 94.996,126.492 95.123,126.492 95.631,125.984 95.631,125.934 96.393,125.172 96.393,124.714 96.52,124.587 96.52,79.121 96.266,78.867 96.266,78.105 96.012,77.851 96.012,77.724 95.631,77.724 95.25,77.343 94.819,77.343 94.819,77.293 94.361,76.835 92.964,76.835 92.961,76.838 27.556,76.838 27.305,77.089 27.051,77.089 26.416,77.724 26.289,77.724 26.035,77.978 26.035,78.282 25.654,78.663 25.654,79.121 25.4,79.375 25.4,124.587 25.527,124.714
GND on Top Layer "Top Layer-GND" (solid, pour order 4): 25.403,124.206 25.403,124.587 25.654,124.838 25.654,125.402 26.035,125.783 26.035,125.984 26.289,125.984 26.543,126.238 26.543,126.365 26.797,126.365 27.178,126.746 27.559,126.746 27.813,127 93.599,127 93.726,126.873 94.234,126.873 94.361,126.746 94.742,126.746 94.869,126.619 95.123,126.619 95.631,126.111 95.631,125.984 95.758,125.984 96.012,125.73 96.012,125.603 96.266,125.349 96.266,125.123 96.393,124.996 96.393,124.513 96.52,124.386 96.52,79.505 96.517,79.502 96.52,79.499 96.52,78.87 96.393,78.743 96.393,78.74 96.266,78.74 96.139,78.613 96.139,78.359 95.504,77.724 95.504,77.597 95.377,77.47 95.123,77.47 94.869,77.216 94.615,77.216 94.234,76.835 28.448,76.835 28.445,76.838 27.683,76.838 27.432,77.089 26.924,77.089 26.416,77.597 26.416,77.724 25.654,78.486 25.654,78.867 25.273,79.248 25.273,79.883 25.4,80.01 25.4,124.587 25.654,124.841

## Keep-outs
Keep-Out Layer:
  lines w0.254: 25.4,123.825 25.4,79.883 ccw(c28.448,79.883) 28.575,76.838 ; 25.403,123.825 cw(c28.448,123.952) 28.448,127 60.071,127 60.071,125.857 68.199,125.857 68.199,127 93.599,127 ; 28.448,76.835 93.472,76.835 ccw(c93.472,79.883) 96.517,80.01 ; 93.345,126.997 cw(c93.472,123.952) 96.52,123.952 96.52,80.01

## Other copper
Top Layer:
  text "71.12 (mm)" at 54.206,133.198 h1.52
  text "56.311 (mm)" at 24.202,97.472 h1.52 r89.87

## Silkscreen, mask and mechanical layers (free items; w line width, h text height)
Top Overlay:
  drawing of 236 lines, arcs and shapes, not listed
  text "+" at 29.845,118.237 h0.6 r90
  text "3V3" at 92.456,116.84 h0.6 r90
  text "-" at 29.845,115.57 h0.6 r90
  text "GND" at 92.456,114.122 h0.6 r90
  text "5V" at 91.821,110.998 h0.6
  text "@Dinh Gioi" at 32.512,96.901 h2.8 r90
  text "NSS" at 47.752,91.389 h0.6 r90
  text "SCK" at 53.594,91.389 h0.6 r90
  text "MOSI" at 49.657,91.313 h0.6 r90
  text "MISO" at 51.689,91.313 h0.6 r90
  text "+" at 85.217,80.899 h1.52
  text "-" at 85.217,78.486 h1.52
  text "BAT" at 65.024,77.851 h0.8
  text "JDC" at 68.961,77.851 h0.8
Bottom Overlay:
  drawing of 11675 lines, arcs and shapes, not listed

## Text inside footprints (layer, text, board x,y; h text height)
IC1: Mechanical 13 "ANTENNA" at 40.228,129.396 h1.78